# Altium PCB NIXIE_Display.PcbDoc
Units mm, origin at the board's own origin, x right, y up, seen from the top; angles counter-clockwise.
Board outline 160 x 40 mm, 2 copper layers (Top Layer, Bottom Layer); 154 components, 100 nets, 392 pads, 90 vias.
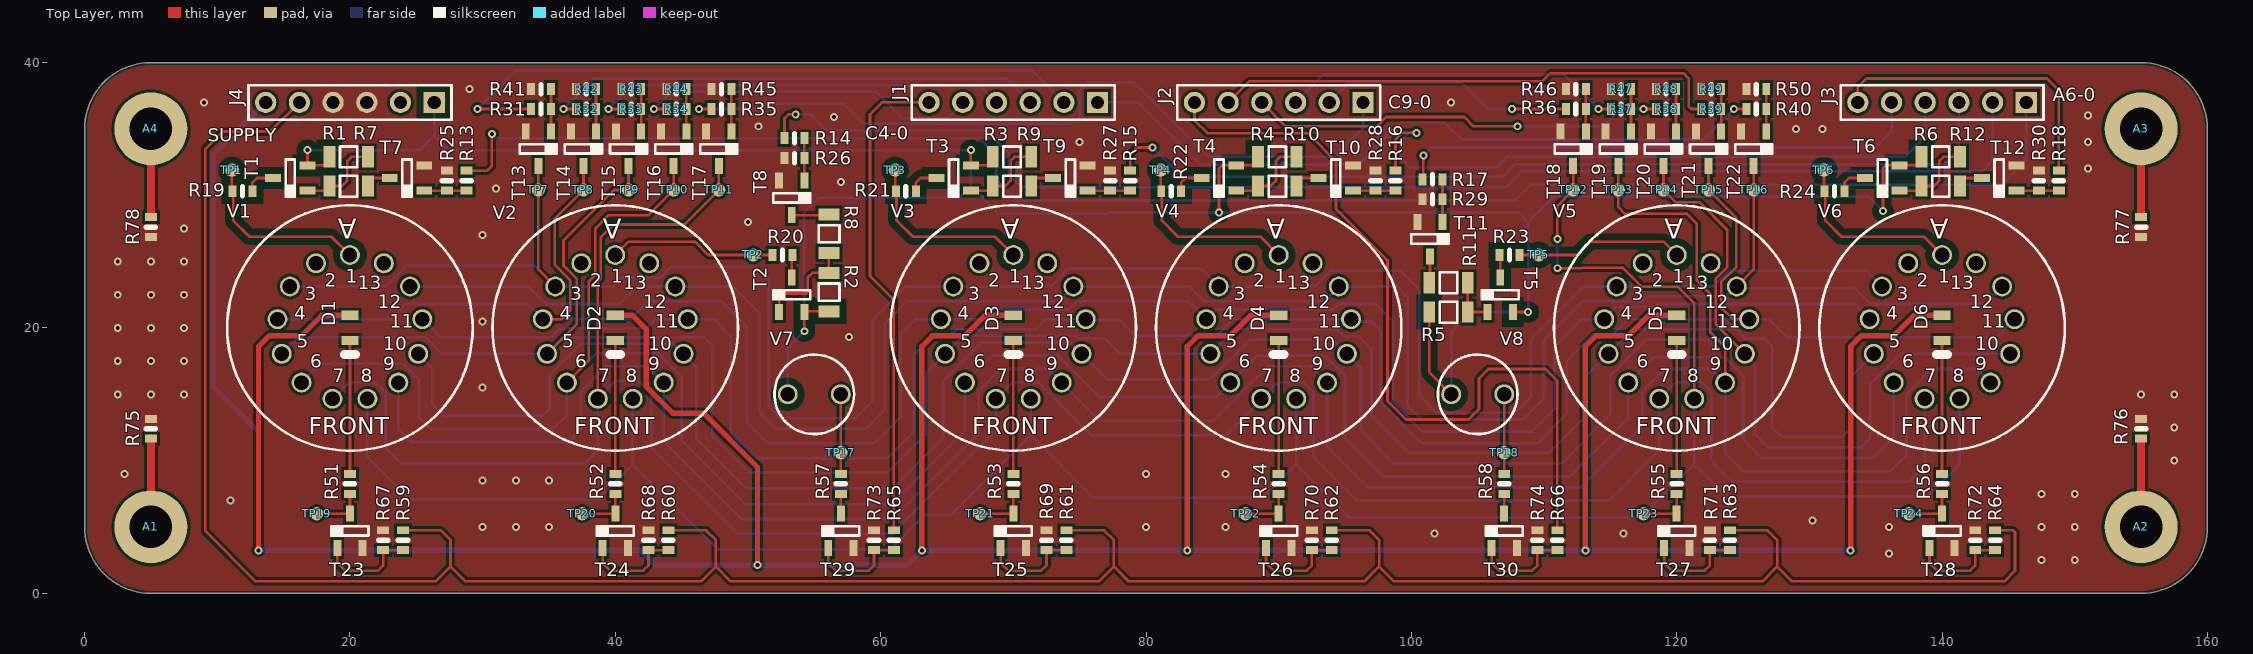
[diagram p0: Top Layer view]
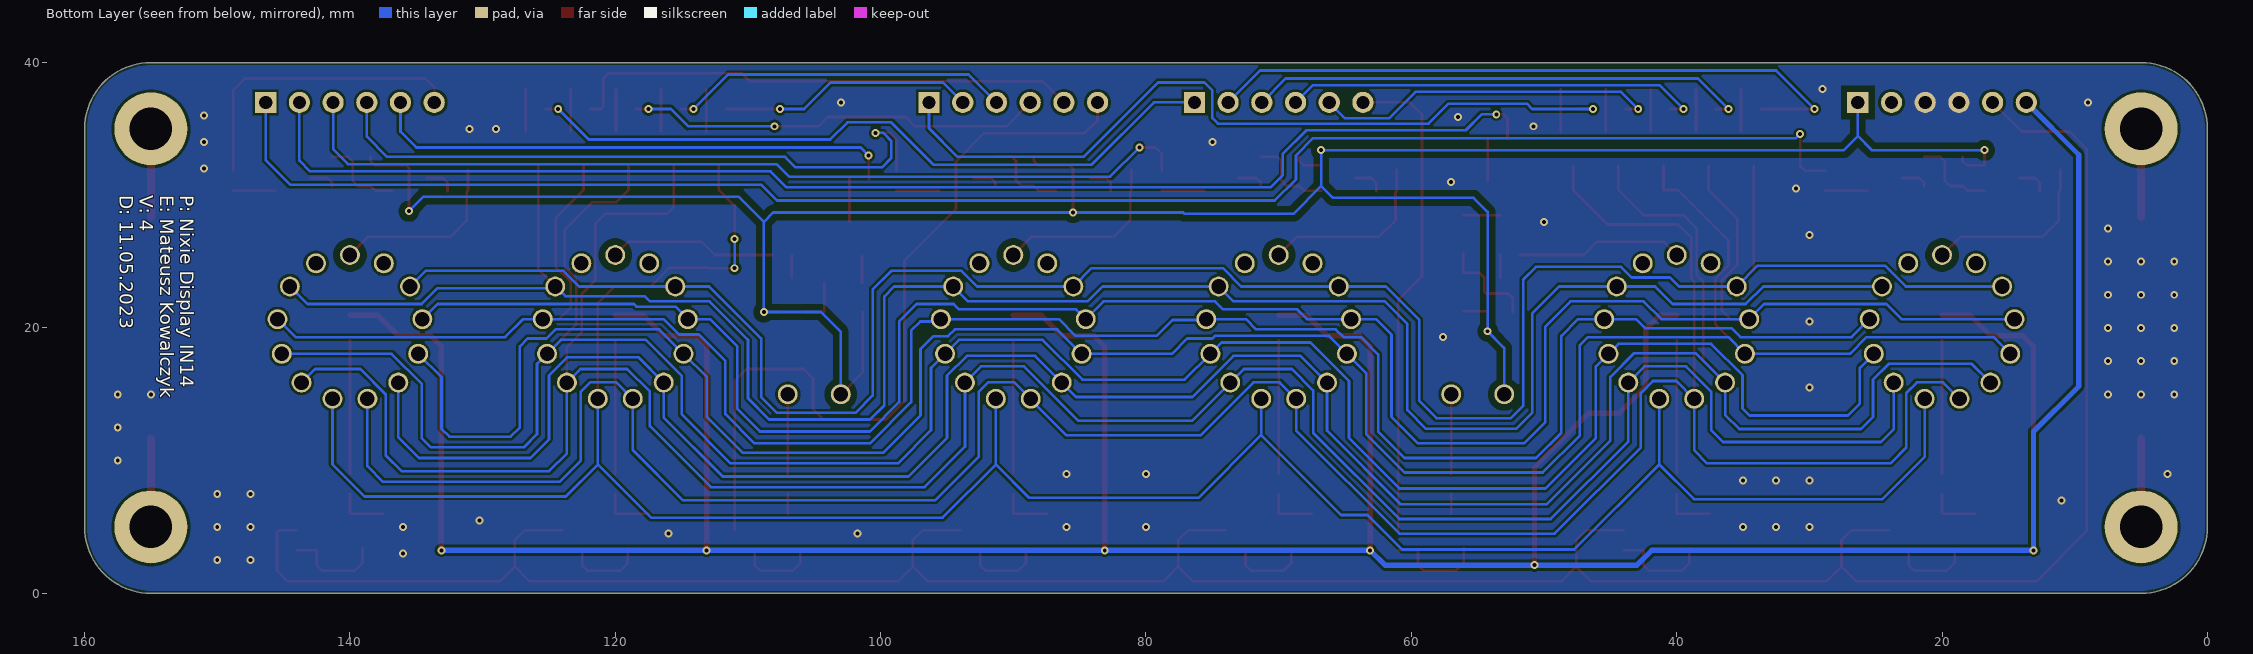
[diagram p1: Bottom Layer view, seen from below]

## Layer stack, top to bottom
Top Solder: solder mask 0.0102, Solder Resist, Dk 3.5
Top Layer: signal copper 0.0356
Dielectric 1: dielectric 0.32, FR-4, Dk 4.8
Bottom Layer: signal copper 0.0356
Bottom Solder: solder mask 0.0102, Solder Resist, Dk 3.5

## Board outline
0,5 0,35 cw(c5,35) 5,40 155,40 cw(c155,35) 160,35 160,5 cw(c155,5) 155,0 5,0 cw(c5,5)

## Design rules (kind name [scope] priority, off if disabled: settings)
BoardOutlineClearance [All] p1: gap=0.2 ignorepadtopadclearanceinfootprint=FALSE
Clearance Clearance_HV [InNetClass('HV')] p1: gap=0.5 ignorepadtopadclearanceinfootprint=FALSE
Clearance [All] p2: gap=0.2 ignorepadtopadclearanceinfootprint=FALSE except(0.25: Arc-Hole Track-Hole SMDPad-Hole THPad-Hole Via-Hole Fill-Hole Poly-Hole Region-Hole Text-Hole)
ComponentClearance [All] p1: gap=0.127 collisioncheckmode=3 verticalgap=0.127 showdistances=TRUE
DiffPairsRouting [All] p1: maxlimit=0.254 minlimit=0.127 mostfreqgap=0.127 toplayer_minwidth=0.127 toplayer_maxwidth=25.4 toplayer_prefwidth=0.127 bottomlayer_minwidth=0.127 bottomlayer_maxwidth=25.4 bottomlayer_prefwidth=0.127 maxuncoupledlength=12.7
Height [All] p1: minheight=0 maxheight=1816.048 prefheight=12.7
HoleSize [All] p1: absolutevalues=TRUE maxlimit=6.3 minlimit=0.3 maxpercent=80.000 minpercent=20.000
HoleToHoleClearance [All] p1: gap=0.25 allowstackedmicrovias=FALSE
MinimumAnnularRing [All] p1: minimumring=0.076
MinimumSolderMaskSliver [All] p1: minsoldermaskwidth=0
PlaneClearance [All] p1: clearance=0.127
PlaneConnect PlaneConnectPowerPads [InPadClass('PowerPads')] p1: planeconnectstyle=Direct reliefexpansion=0.508 reliefentries=4 reliefconductorwidth=0.254 reliefairgap=0.254
PlaneConnect [All] p2: pad.planeconnectstyle=Relief pad.reliefexpansion=0.3 pad.reliefentries=4 pad.reliefconductorwidth=0.127 pad.reliefairgap=0.127 via.planeconnectstyle=Direct via.reliefexpansion=0.3 via.reliefentries=4 via.reliefconductorwidth=0.127 via.reliefairgap=0.127
PolygonConnect [All] p1: connectstyle=Direct reliefconductorwidth=0.127 reliefentries=4 polygonreliefangle="90 Angle" airgapwidth=0.127
PolygonConnect PolygonConnectPowerPads [All vs (InPadClass('PowerPads'))] p2: connectstyle=Direct reliefconductorwidth=0.254 reliefentries=4 polygonreliefangle="90 Angle" airgapwidth=0.254
RoutingVias [All] p1: holewidth=0.3 width=0.6 viastyle="Through Hole" minholewidth=0.3 minwidth=0.6 maxholewidth=0.6 maxwidth=6.6
SilkToSilkClearance [All] p1: silktosilkclearance=0
SilkToSolderMaskClearance [IsPad] p1: minsilkscreentomaskgap=0.127 clearancetoexposedcopper=TRUE
SolderMaskExpansion [All] p1: expansion=0.075 istentingtop=FALSE
Width Width_HV [InNetClass('HV')] p1: maxlimit=10 minlimit=0.2 preferedwidth=0.2 minimp=50.000000 maximp=50.000000 favimp=50.000000
Width Width_Supply [InNetClass('SUPPLY')] p2: maxlimit=0.5 minlimit=0.5 preferedwidth=0.5 minimp=50.000000 maximp=50.000000 favimp=50.000000
Width [All] p3: maxlimit=10 minlimit=0.127 preferedwidth=0.127
20 further rules are at their usual default settings.

## Classes and differential pairs
net class HV: +HV A1 A3 A4 A5 A6 NetR19_2 NetR21_2 NetR22_2 NetR23_2 NetR24_2

## Components (designator, comment, footprint, x,y, rotation, side; value= is the part's Value field where it differs from the comment)
A1 "3mm" "HOLE M3" 5,5 r0 top
A2 "3mm" "HOLE M3" 155,5 r0 top
A3 "3mm" "HOLE M3" 155,35 r0 top
A4 "3mm" "HOLE M3" 5,35 r0 top
D1 "Blue" "LED 0805" 20,20 r270 top
D2 "Blue" "LED 0805" 40,20 r270 top
D3 "Blue" "LED 0805" 70,20 r270 top
D4 "Blue" "LED 0805" 90,20 r270 top
D5 "Blue" "LED 0805" 120,20 r270 top
D6 "Blue" "LED 0805" 140,20 r270 top
J1 "6 PIN" "MECHANICAL PINHEADER 6P 2.54MM MALE" 70,37 r180 top
J2 "6 PIN" "MECHANICAL PINHEADER 6P 2.54MM MALE" 90,37 r180 top
J3 "6 PIN" "MECHANICAL PINHEADER 6P 2.54MM MALE" 140,37 r180 top
J4 "6 PIN" "MECHANICAL PINHEADER 6P 2.54MM MALE" 20,37 r180 top
R1 "470k" "RESISTOR 1206" 19.9,32.9 r180 top
R2 "470k" "RESISTOR 1206" 56.1,22.7 r270 top
R3 "470k" "RESISTOR 1206" 69.9,32.9 r180 top
R4 "470k" "RESISTOR 1206" 89.9,32.9 r180 top
R5 "470k" "RESISTOR 1206" 102.8,21.2 r180 top
R6 "470k" "RESISTOR 1206" 139.9,32.9 r180 top
R7 "270k" "RESISTOR 1206" 19.9,30.7 r180 top
R8 "270k" "RESISTOR 1206" 56.1,27.1 r270 top
R9 "270k" "RESISTOR 1206" 69.9,30.7 r180 top
R10 "270k" "RESISTOR 1206" 89.9,30.7 r180 top
R11 "270k" "RESISTOR 1206" 102.8,23.4 r0 top
R12 "270k" "RESISTOR 1206" 139.9,30.7 r180 top
R13 "2.2k" "RESISTOR 0603" 28.8,31.1 r270 top
R14 "2.2k" "RESISTOR 0603" 53.5,34.3 r0 top
R15 "2.2k" "RESISTOR 0603" 78.8,31.1 r270 top
R16 "2.2k" "RESISTOR 0603" 98.8,31.1 r270 top
R17 "2.2k" "RESISTOR 0603" 101.6,31.2 r0 top
R18 "2.2k" "RESISTOR 0603" 148.8,31.1 r270 top
R19 "12k" "RESISTOR 0603" 11.9,30.3 r0 top
R20 "12k" "RESISTOR 0603" 52.6,25.5 r0 top
R21 "12k" "RESISTOR 0603" 61.9,30.3 r0 top
R22 "12k" "RESISTOR 0603" 81.9,30.3 r0 top
R23 "12k" "RESISTOR 0603" 107.4,25.5 r180 top
R24 "12k" "RESISTOR 0603" 131.9,30.3 r0 top
R25 "470k" "RESISTOR 0603" 27.3,31.1 r270 top
R26 "470k" "RESISTOR 0603" 53.5,32.8 r0 top
R27 "470k" "RESISTOR 0603" 77.3,31.1 r270 top
R28 "470k" "RESISTOR 0603" 97.3,31.1 r270 top
R29 "470k" "RESISTOR 0603" 101.6,29.7 r0 top
R30 "470k" "RESISTOR 0603" 147.3,31.1 r270 top
R31 "2.2k" "RESISTOR 0603" 34.4,36.5 r0 top
R32 "2.2k" "RESISTOR 0603" 37.8,36.5 r0 top
R33 "2.2k" "RESISTOR 0603" 41.2,36.5 r0 top
R34 "2.2k" "RESISTOR 0603" 44.6,36.5 r0 top
R35 "2.2k" "RESISTOR 0603" 48,36.5 r0 top
R36 "2.2k" "RESISTOR 0603" 112.4,36.5 r0 top
R37 "2.2k" "RESISTOR 0603" 115.8,36.5 r0 top
R38 "2.2k" "RESISTOR 0603" 119.2,36.5 r0 top
R39 "2.2k" "RESISTOR 0603" 122.6,36.5 r0 top
R40 "2.2k" "RESISTOR 0603" 126,36.5 r0 top
R41 "470k" "RESISTOR 0603" 34.4,38 r0 top
R42 "470k" "RESISTOR 0603" 37.8,38 r0 top
R43 "470k" "RESISTOR 0603" 41.2,38 r0 top
R44 "470k" "RESISTOR 0603" 44.6,38 r0 top
R45 "470k" "RESISTOR 0603" 48,38 r0 top
R46 "470k" "RESISTOR 0603" 112.4,38 r0 top
R47 "470k" "RESISTOR 0603" 115.8,38 r0 top
R48 "470k" "RESISTOR 0603" 119.2,38 r0 top
R49 "470k" "RESISTOR 0603" 122.6,38 r0 top
R50 "470k" "RESISTOR 0603" 126,38 r0 top
R51 "470R" "RESISTOR 0603" 20,8.25 r90 top
R52 "470R" "RESISTOR 0603" 40,8.25 r90 top
R53 "470R" "RESISTOR 0603" 70,8.25 r90 top
R54 "470R" "RESISTOR 0603" 90,8.25 r90 top
R55 "470R" "RESISTOR 0603" 120,8.25 r90 top
R56 "470R" "RESISTOR 0603" 140,8.25 r90 top
R57 "150k" "RESISTOR 0603" 57,8.25 r90 top
R58 "150k" "RESISTOR 0603" 107,8.25 r90 top
R59 "10k" "RESISTOR 0603" 24,4 r270 top
R60 "10k" "RESISTOR 0603" 44,4 r270 top
R61 "10k" "RESISTOR 0603" 74,4 r270 top
R62 "10k" "RESISTOR 0603" 94,4 r270 top
R63 "10k" "RESISTOR 0603" 124,4 r270 top
R64 "10k" "RESISTOR 0603" 144,4 r270 top
R65 "2.2k" "RESISTOR 0603" 61,4 r270 top
R66 "2.2k" "RESISTOR 0603" 111,4 r270 top
R67 "470k" "RESISTOR 0603" 22.5,4 r270 top
R68 "470k" "RESISTOR 0603" 42.5,4 r270 top
R69 "470k" "RESISTOR 0603" 72.5,4 r270 top
R70 "470k" "RESISTOR 0603" 92.5,4 r270 top
R71 "470k" "RESISTOR 0603" 122.5,4 r270 top
R72 "470k" "RESISTOR 0603" 142.5,4 r270 top
R73 "470k" "RESISTOR 0603" 59.5,4 r270 top
R74 "470k" "RESISTOR 0603" 109.5,4 r270 top
R75 "0R" "RESISTOR 0603" 5,12.4 r270 top
R76 "0R" "RESISTOR 0603" 155,12.4 r270 top
R77 "0R" "RESISTOR 0603" 155,27.6 r90 top
R78 "0R" "RESISTOR 0603" 5,27.6 r90 top
T1 "MMBTA92" SOT23-3 15.5,31.3 r90 top
T2 "MMBTA92" SOT23-3 53.3,22.5 r0 top
T3 "MMBTA92" SOT23-3 65.5,31.3 r90 top
T4 "MMBTA92" SOT23-3 85.5,31.3 r90 top
T5 "MMBTA92" SOT23-3 106.7,22.5 r0 top
T6 "MMBTA92" SOT23-3 135.5,31.3 r90 top
T7 "MMBTA42" SOT23-3 24.3,31.3 r90 top
T8 "MMBTA42" SOT23-3 53.3,29.8 r180 top
T9 "MMBTA42" SOT23-3 74.3,31.3 r90 top
T10 "MMBTA42" SOT23-3 94.3,31.3 r90 top
T11 "MMBTA42" SOT23-3 101.4,26.7 r180 top
T12 "MMBTA42" SOT23-3 144.3,31.3 r90 top
T13 "MMBTA42" SOT23-3 34.2,33.5 r180 top
T14 "MMBTA42" SOT23-3 37.6,33.5 r180 top
T15 "MMBTA42" SOT23-3 41,33.5 r180 top
T16 "MMBTA42" SOT23-3 44.4,33.5 r180 top
T17 "MMBTA42" SOT23-3 47.8,33.5 r180 top
T18 "MMBTA42" SOT23-3 112.2,33.5 r180 top
T19 "MMBTA42" SOT23-3 115.6,33.5 r180 top
T20 "MMBTA42" SOT23-3 119,33.5 r180 top
T21 "MMBTA42" SOT23-3 122.4,33.5 r180 top
T22 "MMBTA42" SOT23-3 125.8,33.5 r180 top
T23 "MMBTA42" SOT23-3 20,4.7 r0 top
T24 "MMBTA42" SOT23-3 40,4.7 r0 top
T25 "MMBTA42" SOT23-3 70,4.7 r0 top
T26 "MMBTA42" SOT23-3 90,4.7 r0 top
T27 "MMBTA42" SOT23-3 120,4.7 r0 top
T28 "MMBTA42" SOT23-3 140,4.7 r0 top
T29 "MMBTA42" SOT23-3 57,4.7 r0 top
T30 "MMBTA42" SOT23-3 107,4.7 r0 top
TP1 "1mm" "TEST POINT 1MM" 11.1,31.9 r90 top
TP2 "1mm" "TEST POINT 1MM" 50.4,25.5 r90 top
TP3 "1mm" "TEST POINT 1MM" 61.1,31.9 r90 top
TP4 "1mm" "TEST POINT 1MM" 81.1,31.9 r90 top
TP5 "1mm" "TEST POINT 1MM" 109.6,25.5 r90 top
TP6 "1mm" "TEST POINT 1MM" 131.1,31.9 r90 top
TP7 "1mm" "TEST POINT 1MM" 34.2,30.4 r90 top
TP8 "1mm" "TEST POINT 1MM" 37.6,30.4 r90 top
TP9 "1mm" "TEST POINT 1MM" 41,30.4 r90 top
TP10 "1mm" "TEST POINT 1MM" 44.4,30.4 r90 top
TP11 "1mm" "TEST POINT 1MM" 47.8,30.4 r90 top
TP12 "1mm" "TEST POINT 1MM" 112.2,30.4 r90 top
TP13 "1mm" "TEST POINT 1MM" 115.6,30.4 r90 top
TP14 "1mm" "TEST POINT 1MM" 119,30.4 r90 top
TP15 "1mm" "TEST POINT 1MM" 122.4,30.4 r90 top
TP16 "1mm" "TEST POINT 1MM" 125.8,30.4 r90 top
TP17 "1mm" "TEST POINT 1MM" 57,10.6 r90 top
TP18 "1mm" "TEST POINT 1MM" 107,10.6 r90 top
TP19 "1mm" "TEST POINT 1MM" 17.5,6 r90 top
TP20 "1mm" "TEST POINT 1MM" 37.5,6 r90 top
TP21 "1mm" "TEST POINT 1MM" 67.5,6 r90 top
TP22 "1mm" "TEST POINT 1MM" 87.5,6 r90 top
TP23 "1mm" "TEST POINT 1MM" 117.5,6 r90 top
TP24 "1mm" "TEST POINT 1MM" 137.5,6 r90 top
V1 "IN-14" IN-14 20,20 r0 top
V2 "IN-14" IN-14 40,20 r0 top
V3 "IN-14" IN-14 70,20 r0 top
V4 "IN-14" IN-14 90,20 r0 top
V5 "IN-14" IN-14 120,20 r0 top
V6 "IN-14" IN-14 140,20 r0 top
V7 "IN-3" IN-3 55,15 r0 top
V8 "IN-3" IN-3 105,15 r0 top

## Footprints (in the part's own frame and the unit in brackets; to place one, negate y for a bottom-side part, rotate by r counter-clockwise, add the part's x,y. Pads: shape width x height; smd on the part's side, far side on the other; paste and mask are expansions set on the pad)
"HOLE M3" [mm]
  round 5.5 hole 3.2: 1(0,0)
IN-3 [mm]
  round 1.5 hole 1.1: 1(2,0) 2(-2,0)
  silkscreen extent -3,-3 3,3
IN-14 [mm]
  round 1.5 hole 1.1: 1(0,5.5) 2(-2.556,4.87) 3(-4.526,3.124) 4(-5.46,0.663) 5(-5.143,-1.95) 6(-3.647,-4.117) 7(-1.317,-5.34) 8(1.317,-5.34) 9(3.647,-4.117) 10(5.143,-1.95) 11(5.46,0.663) 12(4.526,3.124) 13(2.556,4.87)
  silkscreen extent -9.25,-9.25 9.25,9.25, body extent -9.3,-9.5 9.3,9.3, height 59.61
"LED 0805" [mm]
  rect 0.7x1.3 smd: 1(-0.95,0) 2(0.95,0)
  silkscreen extent 2,-0.4 2,0.4, body extent -1.03,-0.46 1.03,0.45, height 0.85
"MECHANICAL PINHEADER 6P 2.54MM MALE" [mm]
  rect 1.6x1.6 hole 1: 1(-6.35,0)
  round 1.6 hole 1: 2(-3.81,0) 3(-1.27,0) 4(1.27,0) 5(3.81,0) 6(6.35,0)
  silkscreen extent -7.65,-1.3 7.65,1.3, body extent -7.7,-1.35 7.7,1.35, height 8.6
"RESISTOR 0603" [mm]
  rect 0.6x0.9 smd: 1(-0.75,0) 2(0.75,0)
  silkscreen extent 0,-0.35 0,0.35, body extent -0.8,-0.4 0.8,0.4, height 0.45
"RESISTOR 1206" [mm]
  rect 0.9x1.6 smd: 1(-1.45,0) 2(1.45,0)
  silkscreen extent -0.65,-0.77 0.65,0.8, body extent -1.6,-0.8 1.6,0.8, height 0.6
SOT23-3 [mm]
  rect 0.6x1.2 smd: 1(-0.95,-1.3) 2(0.95,-1.3) 3(0,1.3)
  silkscreen extent -1.4,-0.35 1.4,0.35, body extent -1.45,-1.4 1.45,1.4, height 1.3
"TEST POINT 1MM" [mm]
  round 1 smd: 1(0,0)

## Part data
A1 A2 A3 A4: library part "Mechanical M3 Hole", "Mechanical M3 Hole", Manufacturer=-, ComponentLink1Description=Datasheet, ComponentLink1URL=-, Manufacturer Part Number=-, Price 10pcs [$]=-, Supplier=-
D1 D2 D3 D4 D5 D6: library part "Diode LED Blue 0805 SMD 20mA", "Standard LEDs - SMD WL-SMCW SMDMono TpVw Waterclr 0805 Blue", Manufacturer="Wurth Elektronik", Manufacturer Part Number=150080BS75000, ComponentLink1Description=Datasheet, ComponentLink1URL=https://www.mouser.pl/datasheet/2/445/150080GS75000-3084983.pdf, Price 10pcs [$]=0.192, Supplier=Mouser
J1 J2 J3 J4: library part "Mechanical Pinheader Male 6pin P=2.54mm THT", "Headers & Wire Housings 2.54MM CGRIDIII HDR 6P VERT SR SEL AU", Manufacturer=Molex, Manufacturer Part Number=90120-0766, ComponentLink1Description=Datasheet, ComponentLink1URL=https://www.mouser.pl/datasheet/2/276/3/0901200765_PCB_HEADERS-2849265.pdf, Price 10pcs [$]=1.65, Supplier=Mouser
R1 R2 R3 R4 R5 R6: library part "Resistor 470k 1% 1/4W 1206", "Thin Film Resistors - SMD 1/4W470 kohm 1% 50ppm", Manufacturer=Yageo, Manufacturer Part Number=RT1206FRE07470KL, ComponentLink1Description=Datasheet, ComponentLink1URL=https://www.mouser.pl/datasheet/2/447/PYu_RT_1_to_0_01_RoHS_L_12-3003070.pdf, Price 10pcs [$]=0.125, Supplier=Mouser
R7 R8 R9 R10 R11 R12: library part "Resistor 270k 1% 1/4W 1206", "Thin Film Resistors - SMD 1/4W 270 kohm 1% 50ppm", Manufacturer=Yageo, Manufacturer Part Number=RT1206FRE07270KL, ComponentLink1Description=Datasheet, ComponentLink1URL=https://www.mouser.pl/datasheet/2/447/PYu_RT_1_to_0_01_RoHS_L_12-3003070.pdf, Price 10pcs [$]=0.125, Supplier=Mouser
R13 R14 R15 R16 R17 R18 R31 R32 R33 R34 R35 R36 R37 R38 R39 R40 R65 R66: library part "Resistor 2.2k 1% 1/10W 0603", "Thin Film Resistors - SMD 1/10W 2.2K ohm 1% 50ppm", Manufacturer=Yageo, Manufacturer Part Number=RT0603FRE072K2L, ComponentLink1Description=Datasheet, ComponentLink1URL=https://www.mouser.pl/datasheet/2/447/PYu_RT_1_to_0_01_RoHS_L_12-3003070.pdf, Price 10pcs [$]=0.057, Supplier=Mouser
R19 R20 R21 R22 R23 R24: library part "Resistor 12k 1% 1/10W 0603", "Thin Film Resistors - SMD 1/10W 12K ohm 1% 50ppm", Manufacturer=Yageo, Manufacturer Part Number=RT0603FRE1312KL, ComponentLink1Description=Datasheet, ComponentLink1URL=https://www.mouser.pl/datasheet/2/447/PYu_RT_1_to_0_01_RoHS_L_12-3003070.pdf, Price 10pcs [$]=0.057, Supplier=Mouser
R25 R26 R27 R28 R29 R30 R41 R42 R43 R44 R45 R46 R47 R48 R49 R50 R67 R68 R69 R70 R71 R72 R73 R74: library part "Resistor 470k 1% 1/10W 0603", "Thin Film Resistors - SMD 1/10W 470K ohm 1% 50ppm", Manufacturer=Yageo, Manufacturer Part Number=RT0603FRE13470KL, ComponentLink1Description=Datasheet, ComponentLink1URL=https://www.mouser.pl/datasheet/2/447/PYu_RT_1_to_0_01_RoHS_L_12-3003070.pdf, Price 10pcs [$]=0.07, Supplier=Mouser
R51 R52 R53 R54 R55 R56: library part "Resistor 470R 1% 1/10W 0603", "Thin Film Resistors - SMD 1/10W 470R ohm 1% 50ppm", Manufacturer=Yageo, Manufacturer Part Number=RT0603FRE07470RL, ComponentLink1Description=Datasheet, ComponentLink1URL=https://www.mouser.pl/datasheet/2/447/PYu_RT_1_to_0_01_RoHS_L_12-3003070.pdf, Price 10pcs [$]=0.057, Supplier=Mouser
R57 R58: library part "Resistor 150k 1% 1/10W 0603", "Thin Film Resistors - SMD 1/10W 150K ohm 1% 50ppm", Manufacturer=Yageo, Manufacturer Part Number=RT0603FRE13150KL, ComponentLink1Description=Datasheet, ComponentLink1URL=https://www.mouser.pl/datasheet/2/447/PYu_RT_1_to_0_01_RoHS_L_12-3003070.pdf, Price 10pcs [$]=0.057, Supplier=Mouser
R59 R60 R61 R62 R63 R64: library part "Resistor 10k 1% 1/10W 0603", "Thin Film Resistors - SMD 1/10W 10K ohm 1% 50ppm", Manufacturer=Yageo, Manufacturer Part Number=RT0603FRE1310KL, ComponentLink1Description=Datasheet, ComponentLink1URL=https://www.mouser.pl/datasheet/2/447/PYu_RT_1_to_0_01_RoHS_L_12-3003070.pdf, Price 10pcs [$]=0.057, Supplier=Mouser
R75 R76 R77 R78: library part "Resistor 0R 1% 1/10W 0603", "Thick Film Resistors - SMD 0 Ohms 100 mW 0603 5%", Manufacturer=Yageo, Manufacturer Part Number=RC0603JR-070RL, ComponentLink1Description=Datasheet, ComponentLink1URL=https://www.mouser.pl/datasheet/2/447/PYu_RC_Group_51_RoHS_L_11-1984063.pdf, Price 10pcs [$]=0.02, Supplier=Mouser
T1 T2 T3 T4 T5 T6: library part "Transistor PNP 500mA 300V MMBTA92", "Bipolar Transistors - BJT BJT, SOT-23, 300V, 500mA, PNP", Manufacturer="Diotec Semiconductor", Manufacturer Part Number=MMBTA42, ComponentLink1Description=Datasheet, ComponentLink1URL=https://www.mouser.pl/datasheet/2/849/mmbta92-2578541.pdf, Price 10pcs [$]=0.285, Supplier=Mouser
T7 T8 T9 T10 T11 T12 T13 T14 T15 T16 T17 T18 T19 T20 T21 T22 T23 T24 T25 T26 T27 T28 T29 T30: library part "Transistor NPN 500mA 300V MMBTA42", "Bipolar Transistors - BJT BJT, SOT-23, 300V, 500mA, NPN", Manufacturer="Diotec Semiconductor", ComponentLink1Description=Datasheet, ComponentLink1URL=https://www.mouser.pl/datasheet/2/849/mmbta42-2577486.pdf, Manufacturer Part Number=MMBTA42, Price 10pcs [$]=0.285, Supplier=Mouser
TP1 TP2 TP3 TP4 TP5 TP6 TP7 TP8 TP9 TP10 TP11 TP12 TP13 TP14 TP15 TP16 TP17 TP18 TP19 TP20 TP21 TP22 TP23 TP24: library part "Mechanical Test Point 1mm", "Tesp Point 1mm", Manufacturer=-, ComponentLink1Description=Datasheet, ComponentLink1URL=-, Manufacturer Part Number=-, Price 10pcs [$]=-, Supplier=-
V1 V2 V3 V4 V5 V6: library part "Tube Nixie IN-14", "Nixie IN-14"
V7 V8: library part "Tube Neon IN-3", "Nixie IN-8-2"

## Via types
v1: diameter 0.6, hole 0.3, Top Layer to Bottom Layer, 90 vias

## Nets (pads, with @x,y where several pads share a name; then routed paths per layer and width w, separated by ;. In a path a pad name is that pad's centre, name@x,y a point inside that pad or via, vN(x,y) a via of type N, cw(c..) or ccw(c..) an arc to the next point about the centre after c; other vN are vias at no path point)
+12V: D1.1 D2.1 D3.1 D4.1 D5.1 D6.1 J4.6 | length 299.3
  Top Layer w0.4: v1(13.109,3.241) 13.109,18.609 13.9,19.4 16.328,19.4 17.878,20.95 D1.1 ; D2.1 41.3,20.95 42.325,19.925 42.325,15.579 44.329,13.575 46.65,13.575 50.725,9.5 v1(50.725,2.125) ; v1(63.109,3.241) 63.109,18.609 63.9,19.4 66.328,19.4 67.878,20.95 D3.1 ; v1(83.109,3.241) 83.109,18.609 83.9,19.4 86.328,19.4 87.878,20.95 D4.1 ; v1(113.109,3.241) 113.109,18.609 113.9,19.4 116.328,19.4 117.878,20.95 D5.1 ; v1(133.109,3.241) 133.109,18.609 133.9,19.4 136.328,19.4 137.878,20.95 D6.1
  Bottom Layer w0.4: J4.6 9.7,33.05 9.7,15.6 13.109,12.191 v1(13.109,3.241) 41.87,3.241 42.987,2.124 61.992,2.124 v1(63.109,3.241) v1(83.109,3.241) v1(113.109,3.241) v1(133.109,3.241)
+HV: J4.1 R1.2 R2.2 R3.2 R4.2 R5.2 R6.2 T1.2 T2.2 T3.2 T4.2 T5.2 T6.2 V7.2 V8.2 | length 204.2
  Top Layer w0.2: v1(16.8,33.4) T1.2 18.1,32.25 18.45,32.6 R1.2 ; v1(54.25,19.75) T2.2 54.3,21.25 R2.2 ; v1(66.8,33.4) T3.2 68.1,32.25 68.45,32.6 R3.2 ; v1(85.5,28.7) 85.5,32 85.75,32.25 T4.2 88.1,32.25 88.45,32.6 R4.2 ; R5.2 101.35,16.65 V8.2 ; T5.2 v1(108.8,21.2) ; v1(135.55,28.8) 135.55,32.05 135.75,32.25 T6.2 138.1,32.25 138.45,32.6 R6.2
  Bottom Layer w0.2: v1(16.8,33.4) 25.3,33.4 26.35,34.45 ; J4.1 26.35,34.45 ; V7.2 53,18.5 v1(54.25,19.75) 54.25,28.75 55.3,29.8 65.9,29.8 66.8,30.7 ; V8.2 103,19.7 104.5,21.2 v1(108.8,21.2) 108.8,28 ; v1(135.55,28.8) 134.45,29.9 110.7,29.9 108.8,28 ; 26.35,34.45 27.4,33.4 v1(66.8,33.4) 66.8,30.7 ; 66.8,30.7 68.9,28.6 77.096,28.6 77.196,28.7 108.1,28.7 108.8,28
A1: R19.1 TP1.1 V1.1 | length 13.7
  Top Layer w0.2: TP1.1 11.1,30.35 R19.1 11.2,30.25 11.2,28.1 12.428,26.872 18.628,26.872 V1.1
A2: R20.1 TP2.1 V2.1 | length 12.7
  Top Layer w0.2: V2.1 41,26.5 46,26.5 47,25.5 TP2.1 R20.1
A3: R21.1 TP3.1 V3.1 | length 15.4
  Top Layer w0.2: V3.1 68.628,26.872 62.428,26.872 61.2,28.1 R21.1@61.2,30.25 ; R21.1@61.1,30.35 R21.1 ; R21.1@61.1,30.35 TP3.1 R21.1@61.1,30.35 ; R21.1@61.1,30.35 R21.1 ; R21.1 R21.1@61.2,30.25 ; R21.1 R21.1@61.2,30.25
A4: R22.1 TP4.1 V4.1 | length 15.4
  Top Layer w0.2: V4.1 88.628,26.872 82.428,26.872 81.2,28.1 R22.1@81.2,30.25 ; R22.1@81.1,30.35 R22.1 ; R22.1@81.1,30.35 TP4.1 R22.1@81.1,30.35 ; R22.1@81.1,30.35 R22.1 ; R22.1 R22.1@81.2,30.25 ; R22.1 R22.1@81.2,30.25
A5: R23.1 TP5.1 V5.1 | length 12.7
  Top Layer w0.2: R23.1 TP5.1 112.5,25.5 113.5,26.5 119,26.5 V5.1
A6: R24.1 TP6.1 V6.1 | length 15.4
  Top Layer w0.2: V6.1 138.628,26.872 132.428,26.872 131.2,28.1 R24.1@131.2,30.25 ; R24.1@131.1,30.35 TP6.1 R24.1@131.1,30.35 ; R24.1@131.1,30.35 R24.1 ; R24.1@131.1,30.35 R24.1 ; R24.1 R24.1@131.2,30.25 ; R24.1 R24.1@131.2,30.25
ANODE1: J3.1 R13.1 | length 128.8
  Top Layer w0.2: R13.1 30.35,31.85 30.7,32.2 v1(30.7,34.6)
  Bottom Layer w0.2: v1(30.7,34.6) 30.717,34.6 31.017,34.3 67.4,34.3 68.7,33 68.7,31.2 70.3,29.6 107.8,29.6 109,30.8 144.5,30.8 146.35,32.65 J3.1
ANODE2: J3.2 R14.1 | length 101.1
  Top Layer w0.2: R14.1 52.75,35.8 53.05,36.1 v1(53.6,36.1)
  Bottom Layer w0.2: v1(53.6,36.1) 54.7,36.1 55.9,34.9 67.9,34.9 69.7,33.1 69.7,31.5 70.6,30.6 107.1,30.6 108.3,31.8 143,31.8 143.81,32.61 J3.2
ANODE3: J3.3 R15.1 | length 69.2
  Top Layer w0.2: R15.1 78.8,33.1 79.3,33.6 v1(80.5,33.6)
  Bottom Layer w0.2: v1(80.5,33.6) 82.7,31.4 106.9,31.4 107.846,32.346 140.146,32.346 141.27,33.47 J3.3
ANODE4: J3.4 R16.1 | length 50.3
  Top Layer w0.2: R16.1 98.8,34.2 99.3,34.7 v1(100.4,34.7)
  Bottom Layer w0.2: v1(100.4,34.7) 99.8,34.7 99.2,34.1 99.2,32.8 99.9,32.1 106.4,32.1 107.2,32.9 137.2,32.9 138.73,34.43 J3.4
ANODE5: J3.5 R17.1 | length 40.1
  Top Layer w0.2: R17.1 100.9,31.25 v1(100.9,33)
  Bottom Layer w0.2: v1(100.9,33) 101.5,33.6 135,33.6 136.19,34.79 J3.5
ANODE6: J3.6 R18.1 | length 23
  Top Layer w0.2: J3.6 133.65,38.15 134.3,38.8 147.9,38.8 148.8,37.9 R18.1
B1: R57.2 TP17.1 V7.1 | length 6
  Top Layer w0.2: R57.2 TP17.1 V7.1
B2: R58.2 TP18.1 V8.1 | length 6
  Top Layer w0.2: R58.2 TP18.1 V8.1
BULB1: J1.6 R65.1 | length 36.9
  Top Layer w0.2: R65.1 61,22.1 59.2,23.9 59.2,36.1 60.1,37 J1.6
BULB2: J2.6 R66.1 | length 60.9
  Top Layer w0.2: J2.6 83.65,35.65 84.625,34.675 92.2,34.675 94.325,32.55 94.325,28.975 98.2,25.1 98.2,14.5 99.6,13.1 104.3,13.1 105.1,13.9 105.1,16.2 105.8,16.9 110.1,16.9 111,16 R66.1
CATHODE0: J1.1 R40.1 | length 53.7
  Top Layer w0.2: v1(124.3,36.5) R40.1
  Bottom Layer w0.2: J1.1 79.4,37 84.1,32.3 96,32.3 99.2,35.5 102.5,35.5 103.8,34.2 122,34.2 v1(124.3,36.5)
CATHODE1: J1.2 R31.1 | length 50.5
  Top Layer w0.2: v1(29.6,36.5) R31.1
  Bottom Layer w0.2: v1(29.6,36.5) 32.5,39.4 71.41,39.4 J1.2
CATHODE2: J1.3 R32.1 | length 37.8
  Top Layer w0.2: v1(36.1,36.5) R32.1
  Bottom Layer w0.2: v1(36.1,36.5) 38.4,38.8 69.47,38.8 J1.3
CATHODE3: J1.4 R33.1 | length 31.5
  Top Layer w0.2: v1(39.5,36.5) R33.1
  Bottom Layer w0.2: v1(39.5,36.5) 41.3,38.3 67.43,38.3 J1.4
CATHODE4: J1.5 R34.1 | length 26.1
  Top Layer w0.2: v1(42.9,36.5) R34.1
  Bottom Layer w0.2: v1(42.9,36.5) 44.2,37.8 59.7,37.8 61.7,35.8 64.99,35.8 J1.5
CATHODE5: J2.1 R35.1 | length 59.4
  Top Layer w0.2: v1(46.3,36.5) R35.1
  Bottom Layer w0.2: v1(46.3,36.5) 50.9,36.5 51.3,36.9 57.2,36.9 58.7,35.4 74.577,35.4 75,35.823 75,37.9 75.6,38.5 79.1,38.5 84.7,32.9 94.2,32.9 96.35,35.05 J2.1
CATHODE6: J2.2 R36.1 | length 19.3
  Top Layer w0.2: v1(107.6,36.5) R36.1
  Bottom Layer w0.2: J2.2 95.31,38.5 103.77,38.5 105.77,36.5 v1(107.6,36.5)
CATHODE7: J2.3 R37.1 | length 25.7
  Top Layer w0.2: v1(114.1,36.5) R37.1
  Bottom Layer w0.2: J2.3 93.37,39.1 111.5,39.1 v1(114.1,36.5)
CATHODE8: J2.4 R38.1 | length 31.6
  Top Layer w0.2: J2.4 90.53,35.2 97.4,35.2 98.1,35.9 104,35.9 104.7,35.2 v1(108,35.2) ; v1(117.5,36.5) R38.1
  Bottom Layer w0.2: v1(108,35.2) 114.5,35.2 115.8,36.5 v1(117.5,36.5)
CATHODE9: J2.5 R39.1 | length 38.9
  Top Layer w0.2: J2.5 87.79,38.6 109.9,38.6 110.5,39.2 120.5,39.2 120.9,38.8 120.9,36.7 121.1,36.5 R39.1
GND: J4.3 J4.4 R25.1 R26.1 R27.1 R28.1 R29.1 R30.1 R41.1 R42.1 R43.1 R44.1 R45.1 R46.1 R47.1 R48.1 R49.1 R50.1 R67.1 R68.1 R69.1 R70.1 R71.1 R72.1 R73.1 R74.1 R75.1 R76.1 R77.1 R78.1 T7.2 T8.2 T9.2 T10.2 T11.2 T12.2 T13.2 T14.2 T15.2 T16.2 T17.2 T18.2 T19.2 T20.2 T21.2 T22.2 T23.2 T24.2 T25.2 T26.2 T27.2 T28.2 T29.2 T30.2
  other v1: 147.5,2.5 150,2.5 136,3 101.75,4.5 116,4.5 30,5 32.5,5 35,5 80,5 86,5 136,5 147.5,5 150,5 130.25,5.5 11,7 147.5,7.5 150,7.5 30,8.5 32.5,8.5 35,8.5 3,9 80,9 86,9 157.5,10 157.5,12.5 2.5,15 5,15 7.5,15 155,15 157.5,15 30,15.5 2.5,17.5 5,17.5 7.5,17.5 57.611,19.32 2.5,20 5,20 7.5,20 30,20.5 2.5,22.5 5,22.5 7.5,22.5 2.5,25 5,25 7.5,25 30,27 7.5,27.5 50,28 31,30.5 57,31 151,32 75,34 151,34 129,35 131,35 50.8,35.2 56.5,35.9 151,36 9,37 103,37 29,38
K0: T22.3 TP16.1 V1.12 V2.12 V3.12 V4.12 V5.12 V6.12 | length 165.5
  Top Layer w0.2: V5.12 125.8,24.398 T22.3
  Bottom Layer w0.2: V1.12 33.476,23.124 34.8,21.8 40.3,21.8 41.624,23.124 V2.12 48.876,23.124 50.9,21.1 50.9,13.6 52.1,12.4 58.9,12.4 60.3,13.8 60.3,20.3 62,22 73.402,22 V3.12 83.276,23.124 84.4,22 93.402,22 V4.12 98.976,23.124 99.727,22.373 99.727,14.173 100.8,13.1 108.4,13.1 110,14.7 110,19.1 112.9,22 117.4,22 117.8,22.4 123.766,22.4 124.49,23.124 V5.12 124.651,23 133.4,23 134.6,21.8 143.202,21.8 V6.12
K1: T13.3 TP7.1 V1.3 V2.3 V3.3 V4.3 V5.3 V6.3 | length 167.7
  Top Layer w0.2: T13.3 TP7.1 34.2,24.398 V2.3
  Bottom Layer w0.2: V1.3 22.724,23.124 24.3,24.7 33.898,24.7 V2.3 39.824,23.124 40.5,23.8 43.4,23.8 44.2,24.6 50.607,24.6 51.575,23.632 51.575,14.125 52.5,13.2 58.1,13.2 59.4,14.5 59.4,20.6 61.924,23.124 V3.3 72.824,23.124 74.2,24.5 84.098,24.5 V4.3 92.724,23.124 93.9,24.3 99.2,24.3 100.6,22.9 100.6,14.9 101.9,13.6 107.8,13.6 109,14.8 109,19.2 112.924,23.124 V5.3 122.724,23.124 123.9,24.3 134.298,24.3 V6.3
K2: T14.3 TP8.1 V1.4 V2.4 V3.4 V4.4 V5.4 V6.4 | length 168.6
  Top Layer w0.2: V2.4 35.963,20.663 36.6,21.3 36.6,23.6 35.425,24.775 35.425,28.225 TP8.1 T14.3
  Bottom Layer w0.2: V1.4 23.063,20.663 24.2,21.8 33.403,21.8 V2.4 41.163,20.663 42.5,22 48,22 49.9,20.1 49.9,12.9 51.5,11.3 59.5,11.3 61.5,13.3 61.5,19.5 62.663,20.663 V3.4 67.863,20.663 68.6,21.4 74.2,21.4 74.8,22 83.203,22 V4.4 85.277,21.4 94.1,21.4 94.5,21.8 97.3,21.8 98.6,20.5 98.6,14.4 100.8,12.2 109.1,12.2 110.8,13.9 110.8,18.6 112.863,20.663 V5.4 115.477,21.6 118.4,21.6 118.6,21.8 133.403,21.8 V6.4
K3: T15.3 TP9.1 V1.5 V2.5 V3.5 V4.5 V5.5 V6.5 | length 180.4
  Top Layer w0.2: V2.5 37.1,20.292 37.1,23.7 36.1,24.7 36.1,26.6 39.9,30.4 TP9.1 T15.3
  Bottom Layer w0.2: V1.5 16.108,19.3 25.7,19.3 26.95,18.05 V2.5 36.108,19.3 46.7,19.3 47.3,18.7 47.3,11.9 50.1,9.1 60.5,9.1 63.404,12.004 63.404,16.596 V3.5 66.208,19.4 74.8,19.4 75,19.2 76.9,19.2 78.05,18.05 V4.5 86.708,19.9 94.4,19.9 94.925,19.375 96.025,19.375 97,18.4 97,13.4 99.8,10.6 110.4,10.6 113.1,13.3 113.1,16.292 V5.5 116.708,19.9 124.5,19.9 125.2,19.2 126.6,19.2 127.2,18.6 127.2,12.5 127.9,11.8 132.5,11.8 133.1,12.4 133.1,16.292 V6.5
K4: T16.3 TP10.1 V1.6 V2.6 V3.6 V4.6 V5.6 V6.6 | length 188.9
  Top Layer w0.2: V2.6 38,17.531 38,23.5 38.5,24 38.5,27.5 39.5,28.5 42.5,28.5 TP10.1 T16.3
  Bottom Layer w0.2: V1.6 17.769,17.3 24,17.3 25.2,16.1 25.2,13.3 26.117,12.383 35.283,12.383 36.353,13.453 V2.6 38.569,18.1 43.2,18.1 45,16.3 45,11.5 49.8,6.7 60.8,6.7 66.353,12.253 V3.6 68.369,17.9 73.4,17.9 76.5,14.8 85.269,14.8 V4.6 88.369,17.9 93.5,17.9 95,16.4 95,11.7 97.9,8.8 111.9,8.8 116.353,13.253 V5.6 118.269,17.8 123.6,17.8 125,16.4 125,11.6 126.4,10.2 134.8,10.2 136.353,11.753 V6.6
K5: T17.3 TP11.1 V1.7 V2.7 V3.7 V4.7 V5.7 V6.7 | length 195.6
  Top Layer w0.2: V2.7 38.683,23.483 38.9,23.7 38.9,26.8 39.9,27.8 45.2,27.8 TP11.1 T17.3
  Bottom Layer w0.2: V1.7 19.923,15.9 21.9,15.9 22.7,15.1 22.7,11 23.9,9.8 37.7,9.8 38.683,10.783 V2.7 40.023,16 41.8,16 42.7,15.1 42.7,11 49.2,4.5 60.9,4.5 68.683,12.283 V3.7 69.923,15.9 71.9,15.9 75.9,11.9 86,11.9 88.683,14.583 V4.7 89.923,15.9 91.9,15.9 92.6,15.2 92.6,10.3 95.9,7 114.9,7 118.683,10.783 V5.7 119.923,15.9 121.9,15.9 122.6,15.2 122.6,10 124.2,8.4 137.5,8.4 138.683,9.583 V6.7
K6: T18.3 TP12.1 V1.8 V2.8 V3.8 V4.8 V5.8 V6.8 | length 190.7
  Top Layer w0.2: v1(111,24.5) 112.85,24.5 112.875,24.525 115.95,24.525 117.375,23.1 120.1,23.1 121.317,21.883 V5.8 ; v1(111.006,26.708) 111.006,29.206 TP12.1 T18.3
  Bottom Layer w0.2: V1.8 21.317,10.283 24.5,7.1 38.7,7.1 41.317,9.717 ; V2.8 41.317,9.717 ; V3.8 71.317,11.917 ; V4.8 91.317,9.717 ; v1(111,24.5) 111,26.702 v1(111.006,26.708) ; V5.8 121.317,9.717 ; V6.8 141.317,9.717 138.9,7.3 123.733,7.3 121.317,9.717 ; 41.317,9.717 47.733,3.3 60.7,3.3 63.3,5.9 65.3,5.9 71.317,11.917 ; 71.317,11.917 76.033,7.2 88.8,7.2 91.317,9.717 ; 91.317,9.717 95.333,5.7 117.3,5.7 121.317,9.717
K7: T19.3 TP13.1 V1.9 V2.9 V3.9 V4.9 V5.9 V6.9 | length 192
  Top Layer w0.2: T19.3 TP13.1 115.6,29.1 116.1,28.6 120.775,28.6 121.5,27.875 121.5,23.6 122.524,22.576 122.524,19.676 123.647,18.553 V5.9
  Bottom Layer w0.2: V1.9 23.647,12.353 24.6,11.4 36.5,11.4 37.4,12.3 37.4,15.2 39.3,17.1 42.431,17.1 V2.9 43.647,11.453 49.5,5.6 60.9,5.6 67.4,12.1 67.4,15.3 69,16.9 72.631,16.9 V3.9 76.531,13 85.1,13 89.2,17.1 92.431,17.1 V4.9 93.647,11.053 96.7,8 112.8,8 117.4,12.6 117.4,15.2 119.1,16.9 122.631,16.9 V5.9 123.647,10.553 125,9.2 136.1,9.2 137.3,10.4 137.3,15 139.2,16.9 142.631,16.9 V6.9
K8: T20.3 TP14.1 V1.10 V2.10 V3.10 V4.10 V5.10 V6.10 | length 186.7
  Top Layer w0.2: T20.3 TP14.1 119.925,29.475 121.725,29.475 123.8,27.4 123.8,24.562 122.95,23.712 122.95,20.242 V5.10
  Bottom Layer w0.2: V1.10 26.2,16.992 26.2,14.3 27.1,13.4 34.5,13.4 35.036,13.936 35.036,16.436 37.4,18.8 44.392,18.8 V2.10 46.1,17.092 46.1,11.7 49.9,7.9 60.9,7.9 64.7,11.7 64.7,16 67.6,18.9 74.292,18.9 V3.10 77.092,16.1 84.8,16.1 87.8,19.1 94.092,19.1 V4.10 96.2,16.992 96.2,12.3 98.7,9.8 111.3,9.8 115,13.5 115,16.4 117.7,19.1 124.092,19.1 V5.10 125.9,17.292 125.9,12 126.9,11 133.9,11 134.6,11.7 134.6,15.8 136.85,18.05 V6.10
K9: T21.3 TP15.1 V1.11 V2.11 V3.11 V4.11 V5.11 V6.11 | length 167.4
  Top Layer w0.2: T21.3 TP15.1 124.5,28.3 124.5,24.6 123.35,23.45 123.35,21.55 124.237,20.663 V5.11
  Bottom Layer w0.2: V1.11 26.823,19.3 35.2,19.3 35.882,19.982 42.382,19.982 43.063,20.663 V2.11 47.437,20.663 48.7,19.4 48.7,12.1 50.6,10.2 60.5,10.2 62.5,12.2 62.5,18 63.8,19.3 65.1,19.3 65.7,19.9 71.7,19.9 72.463,20.663 V3.11 75.523,20.6 78,20.6 79.2,19.4 85.3,19.4 86.563,20.663 V4.11 95.633,20.49 97.01,20.49 97.7,19.8 97.7,14.4 100.8,11.3 109.5,11.3 111.7,13.5 111.7,17.5 113.7,19.5 115.2,19.5 116.363,20.663 V5.11 126.937,20.663 128.3,19.3 144.097,19.3 V6.11
LED1: R51.1 T23.3 TP19.1 | length 4
  Top Layer w0.2: TP19.1 T23.3 R51.1
LED2: R52.1 T24.3 TP20.1 | length 4
  Top Layer w0.2: TP20.1 T24.3 R52.1
LED3: R53.1 T25.3 TP21.1 | length 4
  Top Layer w0.2: TP21.1 T25.3 R53.1
LED4: R54.1 T26.3 TP22.1 | length 4
  Top Layer w0.2: TP22.1 T26.3 R54.1
LED5: R55.1 T27.3 TP23.1 | length 4
  Top Layer w0.2: TP23.1 T27.3 R55.1
LED6: R56.1 T28.3 TP24.1 | length 4
  Top Layer w0.2: TP24.1 T28.3 R56.1
NetA1_1: A1.1 R75.2 | length 6.6
  Top Layer w0.6: A1.1 R75.2
NetA2_1: A2.1 R76.2 | length 6.6
  Top Layer w0.6: A2.1 R76.2
NetA3_1: A3.1 R77.2 | length 6.7
  Top Layer w0.6: R77.2 A3.1
NetA4_1: A4.1 R78.2 | length 6.6
  Top Layer w0.6: R78.2 A4.1
NetD1_2: D1.2 R51.2 | length 10
  Top Layer w0.2: R51.2 D1.2
NetD2_2: D2.2 R52.2 | length 10
  Top Layer w0.2: R52.2 D2.2
NetD3_2: D3.2 R53.2 | length 10
  Top Layer w0.2: R53.2 D3.2
NetD4_2: D4.2 R54.2 | length 10
  Top Layer w0.2: R54.2 D4.2
NetD5_2: D5.2 R55.2 | length 10
  Top Layer w0.2: R55.2 D5.2
NetD6_2: D6.2 R56.2 | length 10.1
  Top Layer w0.2: R56.2 D6.2
NetR1_1: R1.1 R7.2 T1.1 | length 6.5
  Top Layer w0.2: T1.1 18.1,30.35 R7.2 19.4,30.7 19.8,31.1 19.8,32.6 20.1,32.9 R1.1
NetR2_1: R2.1 R8.2 T2.1 | length 7.7
  Top Layer w0.2: T2.1 52.35,22.25 52.7,22.6 54.383,22.6 54.5,22.717 54.5,23.783 54.867,24.15 R2.1 R8.2
NetR3_1: R3.1 R9.2 T3.1 | length 6.5
  Top Layer w0.2: T3.1 68.1,30.35 R9.2 69.4,30.7 69.8,31.1 69.8,32.6 70.1,32.9 R3.1
NetR4_1: R4.1 R10.2 T4.1 | length 6.5
  Top Layer w0.2: T4.1 88.1,30.35 R10.2 89.4,30.7 89.8,31.1 89.8,32.6 90.1,32.9 R4.1
NetR5_1: R5.1 R11.2 T5.1 | length 3.7
  Top Layer w0.2: R11.2 R5.1 T5.1
NetR6_1: R6.1 R12.2 T6.1 | length 6.5
  Top Layer w0.2: T6.1 138.1,30.35 R12.2 139.4,30.7 139.8,31.1 139.8,32.6 140.1,32.9 R6.1
NetR7_1: R7.1 T7.3 | length 2
  Top Layer w0.2: R7.1 21.35,30.95 21.7,31.3 T7.3
NetR8_1: R8.1 T8.3 | length 2.8
  Top Layer w0.2: T8.3 56.05,28.5 R8.1
NetR9_1: R9.1 T9.3 | length 2
  Top Layer w0.2: R9.1 71.35,30.95 71.7,31.3 T9.3
NetR10_1: R10.1 T10.3 | length 2
  Top Layer w0.2: R10.1 91.35,30.95 91.7,31.3 T10.3
NetR11_1: R11.1 T11.3 | length 2
  Top Layer w0.2: R11.1 101.4,23.45 T11.3
NetR12_1: R12.1 T12.3 | length 2
  Top Layer w0.2: R12.1 141.35,30.95 141.7,31.3 T12.3
NetR13_2: R13.2 R25.2 T7.1 | length 3.2
  Top Layer w0.2: T7.1 R25.2 R13.2
NetR14_2: R14.2 R26.2 T8.1 | length 3.2
  Top Layer w0.2: T8.1 R26.2 R14.2
NetR15_2: R15.2 R27.2 T9.1 | length 3.2
  Top Layer w0.2: T9.1 R27.2 R15.2
NetR16_2: R16.2 R28.2 T10.1 | length 3.2
  Top Layer w0.2: T10.1 R28.2 R16.2
NetR17_2: R17.2 R29.2 T11.1 | length 3.2
  Top Layer w0.2: T11.1 R29.2 R17.2
NetR18_2: R18.2 R30.2 T12.1 | length 3.2
  Top Layer w0.2: T12.1 R30.2 R18.2
NetR19_2: R19.2 T1.3 | length 2.3
  Top Layer w0.2: R19.2 12.65,30.95 13,31.3 T1.3
NetR20_2: R20.2 T2.3 | length 1.7
  Top Layer w0.2: T2.3 53.3,25.45 R20.2
NetR21_2: R21.2 T3.3 | length 2.3
  Top Layer w0.2: R21.2 62.65,30.95 63,31.3 T3.3
NetR22_2: R22.2 T4.3 | length 2.3
  Top Layer w0.2: R22.2 82.65,30.95 83,31.3 T4.3
NetR23_2: R23.2 T5.3 | length 1.7
  Top Layer w0.2: R23.2 106.7,25.45 T5.3
NetR24_2: R24.2 T6.3 | length 2.3
  Top Layer w0.2: R24.2 132.65,30.95 133,31.3 T6.3
NetR31_2: R31.2 R41.2 T13.1 | length 3.2
  Top Layer w0.2: T13.1 R31.2 R41.2
NetR32_2: R32.2 R42.2 T14.1 | length 3.2
  Top Layer w0.2: T14.1 R32.2 R42.2
NetR33_2: R33.2 R43.2 T15.1 | length 3.2
  Top Layer w0.2: T15.1 41.95,36.7 R43.2
NetR34_2: R34.2 R44.2 T16.1 | length 3.2
  Top Layer w0.2: T16.1 R34.2 R44.2
NetR35_2: R35.2 R45.2 T17.1 | length 3.2
  Top Layer w0.2: T17.1 R35.2 R45.2
NetR36_2: R36.2 R46.2 T18.1 | length 3.2
  Top Layer w0.2: T18.1 R36.2 R46.2
NetR37_2: R37.2 R47.2 T19.1 | length 3.2
  Top Layer w0.2: T19.1 R37.2 R47.2
NetR38_2: R38.2 R48.2 T20.1 | length 3.2
  Top Layer w0.2: T20.1 R38.2 R48.2
NetR39_2: R39.2 R49.2 T21.1 | length 3.2
  Top Layer w0.2: T21.1 R39.2 R49.2
NetR40_2: R40.2 R50.2 T22.1 | length 3.2
  Top Layer w0.2: T22.1 R40.2 R50.2
NetR57_1: R57.1 T29.3 | length 1.5
  Top Layer w0.2: T29.3 R57.1
NetR58_1: R58.1 T30.3 | length 1.5
  Top Layer w0.2: T30.3 R58.1
NetR59_2: R59.2 R67.2 T23.1 | length 7.6
  Top Layer w0.2: T23.1 19.05,2.267 19.617,1.7 22.1,1.7 22.5,2.1 R67.2 R59.2
NetR60_2: R60.2 R68.2 T24.1 | length 7.6
  Top Layer w0.2: T24.1 39.05,2.267 39.617,1.7 42.1,1.7 42.5,2.1 R68.2 R60.2
NetR61_2: R61.2 R69.2 T25.1 | length 7.6
  Top Layer w0.2: T25.1 69.05,2.267 69.617,1.7 72.1,1.7 72.5,2.1 R69.2 R61.2
NetR62_2: R62.2 R70.2 T26.1 | length 7.6
  Top Layer w0.2: T26.1 89.05,2.267 89.617,1.7 92.1,1.7 92.5,2.1 R70.2 R62.2
NetR63_2: R63.2 R71.2 T27.1 | length 7.6
  Top Layer w0.2: T27.1 119.05,2.267 119.617,1.7 122.1,1.7 122.5,2.1 R71.2 R63.2
NetR64_2: R64.2 R72.2 T28.1 | length 7.6
  Top Layer w0.2: T28.1 139.05,2.267 139.617,1.7 142.1,1.7 142.5,2.1 R72.2 R64.2
NetR65_2: R65.2 R73.2 T29.1 | length 7.6
  Top Layer w0.2: T29.1 56.05,2.267 56.617,1.7 59.1,1.7 59.5,2.1 R73.2 R65.2
NetR66_2: R66.2 R74.2 T30.1 | length 7.6
  Top Layer w0.2: T30.1 106.05,2.267 106.617,1.7 109.1,1.7 109.5,2.1 R74.2 R66.2
PWM: J4.5 R59.1 R60.1 R61.1 R62.1 R63.1 R64.1 | length 214.2
  Top Layer w0.2: J4.5 13.99,34.8 10.4,34.8 9.1,33.5 9.1,4.684 12.884,0.9 26.45,0.9 27.575,2.025 ; R59.1 26.85,4.75 27.575,4.025 27.575,2.025 ; R60.1 46.85,4.75 47.575,4.025 47.575,2.025 ; R61.1 76.85,4.75 77.575,4.025 77.575,2.025 ; R62.1 96.85,4.75 97.575,4.025 97.575,2.025 ; R63.1 126.85,4.75 127.575,4.025 127.575,2.025 ; R64.1 145.35,4.75 145.5,4.6 145.5,1.7 144.7,0.9 128.7,0.9 127.575,2.025 ; 27.575,2.025 28.7,0.9 46.45,0.9 47.575,2.025 ; 47.575,2.025 48.7,0.9 76.45,0.9 77.575,2.025 ; 77.575,2.025 78.7,0.9 96.45,0.9 97.575,2.025 ; 97.575,2.025 98.7,0.9 126.45,0.9 127.575,2.025
pads on no net: J4.2 V1.2 V1.13 V2.2 V2.13 V3.2 V3.13 V4.2 V4.13 V5.2 V5.13 V6.2 V6.13

## Polygon pours and split planes (outlines as drawn)
GND on Top Layer "GND_L01_P000" (solid, pour order 0): 0,0 0,40 160,40 160,0
GND on Bottom Layer "GND_L02_P001" (solid, pour order 1): 0,0 0,40 160,40 160,0

## Silkscreen, mask and mechanical layers (free items; w line width, h text height)
Top Overlay:
  text "A6-0" at 148.327,37.077 h1.02
  text "C9-0" at 98.252,36.502 h1.02
  text "C4-0" at 58.852,34.177 h1.02
  text "SUPPLY" at 9.277,34.027 h1.02
Bottom Overlay:
  text "P: Nixie Display IN14 / E: Mateusz Kowalczyk / V: 4 / D: 11.05.2023" at 157.35,30 h1.02 r90
PCB Outline:
  the board outline again, w0.1

## Dimensions
-0.5,40 to 0.5,0 on Dimensions
0,0 to 160,5 on Dimensions

## Text inside footprints (layer, text, board x,y; h text height)
V1: Top Overlay "A" at 20.5,28.225 h1.52 r180; Top Overlay "13" at 20.6,22.9 h1.02; Top Overlay "12" at 22.1,21.5 h1.02; Top Overlay "11" at 23,20 h1.02; Top Overlay "10" at 22.5,18.3 h1.02; Top Overlay "9" at 22.5,16.8 h1.02; Top Overlay "8" at 20.8,15.9 h1.02; Top Overlay "1" at 19.7,23.4 h1.02; Top Overlay "7" at 18.7,15.9 h1.02; Top Overlay "6" at 17,17 h1.02; Top Overlay "5" at 16,18.5 h1.02; Top Overlay "4" at 15.8,20.6 h1.02; Top Overlay "3" at 16.6,22.1 h1.02; Top Overlay "2" at 18.1,23.1 h1.02; Top Overlay "FRONT" at 16.9,12 h1.3
V2: Top Overlay "A" at 40.5,28.225 h1.52 r180; Top Overlay "13" at 40.6,22.9 h1.02; Top Overlay "12" at 42.1,21.5 h1.02; Top Overlay "11" at 43,20 h1.02; Top Overlay "10" at 42.5,18.3 h1.02; Top Overlay "9" at 42.5,16.8 h1.02; Top Overlay "8" at 40.8,15.9 h1.02; Top Overlay "1" at 39.7,23.4 h1.02; Top Overlay "7" at 38.7,15.9 h1.02; Top Overlay "6" at 37,17 h1.02; Top Overlay "5" at 36,18.5 h1.02; Top Overlay "4" at 35.8,20.6 h1.02; Top Overlay "3" at 36.6,22.1 h1.02; Top Overlay "2" at 38.1,23.1 h1.02; Top Overlay "FRONT" at 36.9,12 h1.3
V3: Top Overlay "A" at 70.5,28.225 h1.52 r180; Top Overlay "13" at 70.6,22.9 h1.02; Top Overlay "12" at 72.1,21.5 h1.02; Top Overlay "11" at 73,20 h1.02; Top Overlay "10" at 72.5,18.3 h1.02; Top Overlay "9" at 72.5,16.8 h1.02; Top Overlay "8" at 70.8,15.9 h1.02; Top Overlay "1" at 69.7,23.4 h1.02; Top Overlay "7" at 68.7,15.9 h1.02; Top Overlay "6" at 67,17 h1.02; Top Overlay "5" at 66,18.5 h1.02; Top Overlay "4" at 65.8,20.6 h1.02; Top Overlay "3" at 66.6,22.1 h1.02; Top Overlay "2" at 68.1,23.1 h1.02; Top Overlay "FRONT" at 66.9,12 h1.3
V4: Top Overlay "A" at 90.5,28.225 h1.52 r180; Top Overlay "13" at 90.6,22.9 h1.02; Top Overlay "12" at 92.1,21.5 h1.02; Top Overlay "11" at 93,20 h1.02; Top Overlay "10" at 92.5,18.3 h1.02; Top Overlay "9" at 92.5,16.8 h1.02; Top Overlay "8" at 90.8,15.9 h1.02; Top Overlay "1" at 89.7,23.4 h1.02; Top Overlay "7" at 88.7,15.9 h1.02; Top Overlay "6" at 87,17 h1.02; Top Overlay "5" at 86,18.5 h1.02; Top Overlay "4" at 85.8,20.6 h1.02; Top Overlay "3" at 86.6,22.1 h1.02; Top Overlay "2" at 88.1,23.1 h1.02; Top Overlay "FRONT" at 86.9,12 h1.3
V5: Top Overlay "A" at 120.5,28.225 h1.52 r180; Top Overlay "13" at 120.6,22.9 h1.02; Top Overlay "12" at 122.1,21.5 h1.02; Top Overlay "11" at 123,20 h1.02; Top Overlay "10" at 122.5,18.3 h1.02; Top Overlay "9" at 122.5,16.8 h1.02; Top Overlay "8" at 120.8,15.9 h1.02; Top Overlay "1" at 119.7,23.4 h1.02; Top Overlay "7" at 118.7,15.9 h1.02; Top Overlay "6" at 117,17 h1.02; Top Overlay "5" at 116,18.5 h1.02; Top Overlay "4" at 115.8,20.6 h1.02; Top Overlay "3" at 116.6,22.1 h1.02; Top Overlay "2" at 118.1,23.1 h1.02; Top Overlay "FRONT" at 116.9,12 h1.3
V6: Top Overlay "A" at 140.5,28.225 h1.52 r180; Top Overlay "13" at 140.6,22.9 h1.02; Top Overlay "12" at 142.1,21.5 h1.02; Top Overlay "11" at 143,20 h1.02; Top Overlay "10" at 142.5,18.3 h1.02; Top Overlay "9" at 142.5,16.8 h1.02; Top Overlay "8" at 140.8,15.9 h1.02; Top Overlay "1" at 139.7,23.4 h1.02; Top Overlay "7" at 138.7,15.9 h1.02; Top Overlay "6" at 137,17 h1.02; Top Overlay "5" at 136,18.5 h1.02; Top Overlay "4" at 135.8,20.6 h1.02; Top Overlay "3" at 136.6,22.1 h1.02; Top Overlay "2" at 138.1,23.1 h1.02; Top Overlay "FRONT" at 136.9,12 h1.3